# EAGLE board LCmeter0-nokia3310 (EAGLE 7.3.0)
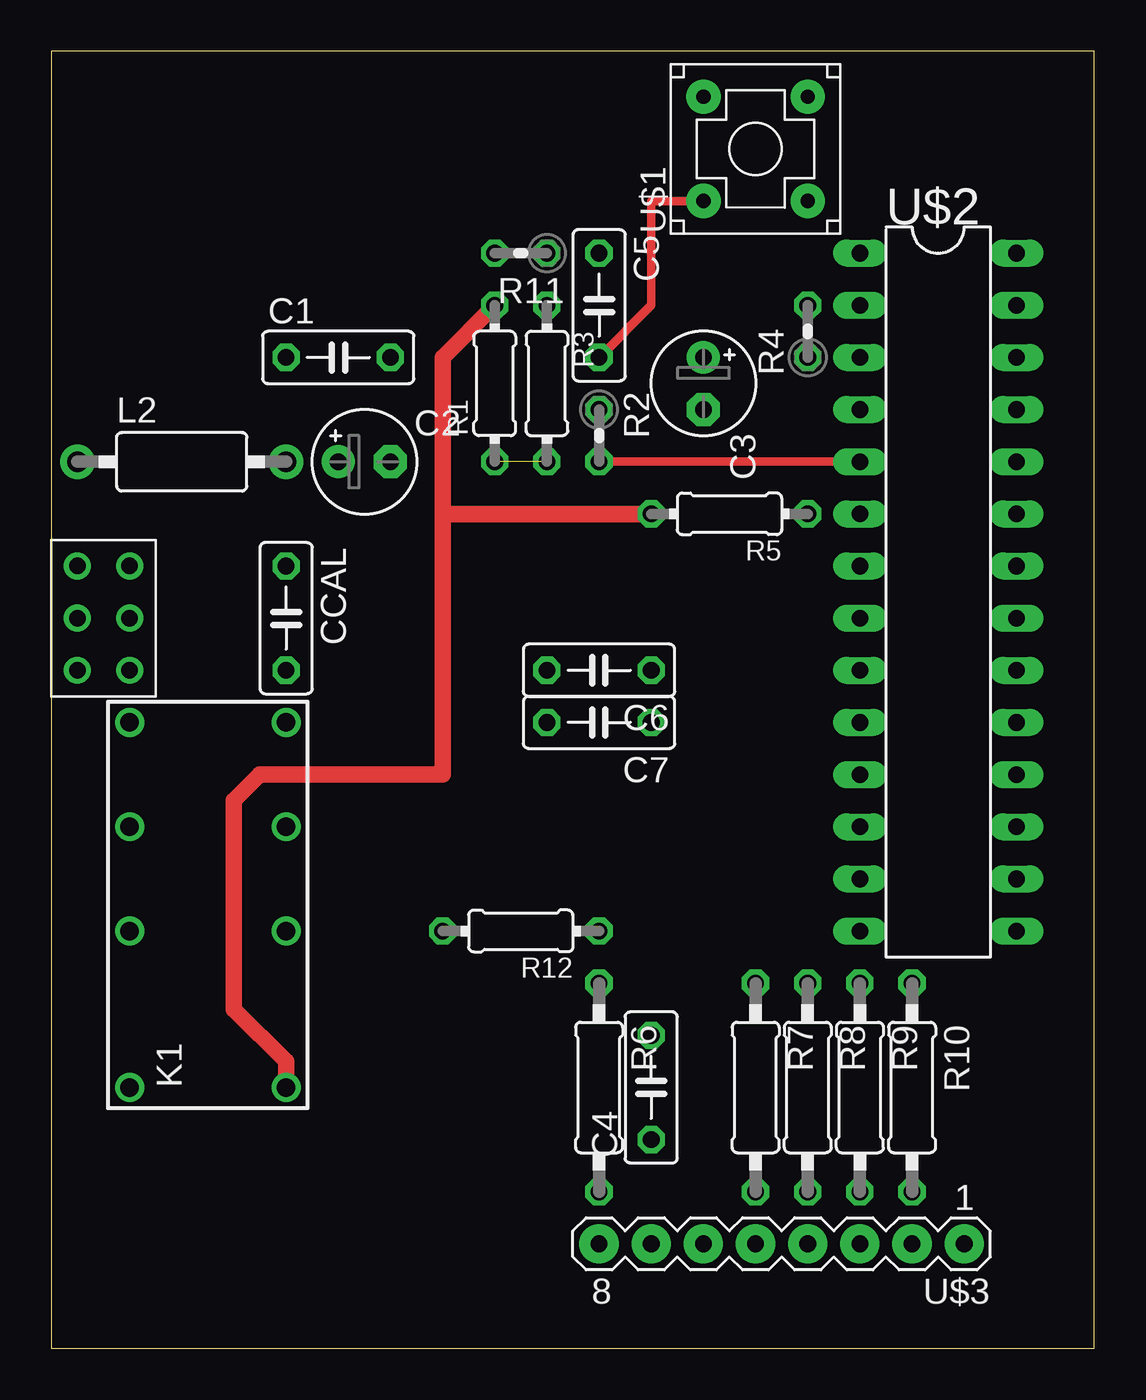
[diagram p0: board, top side]
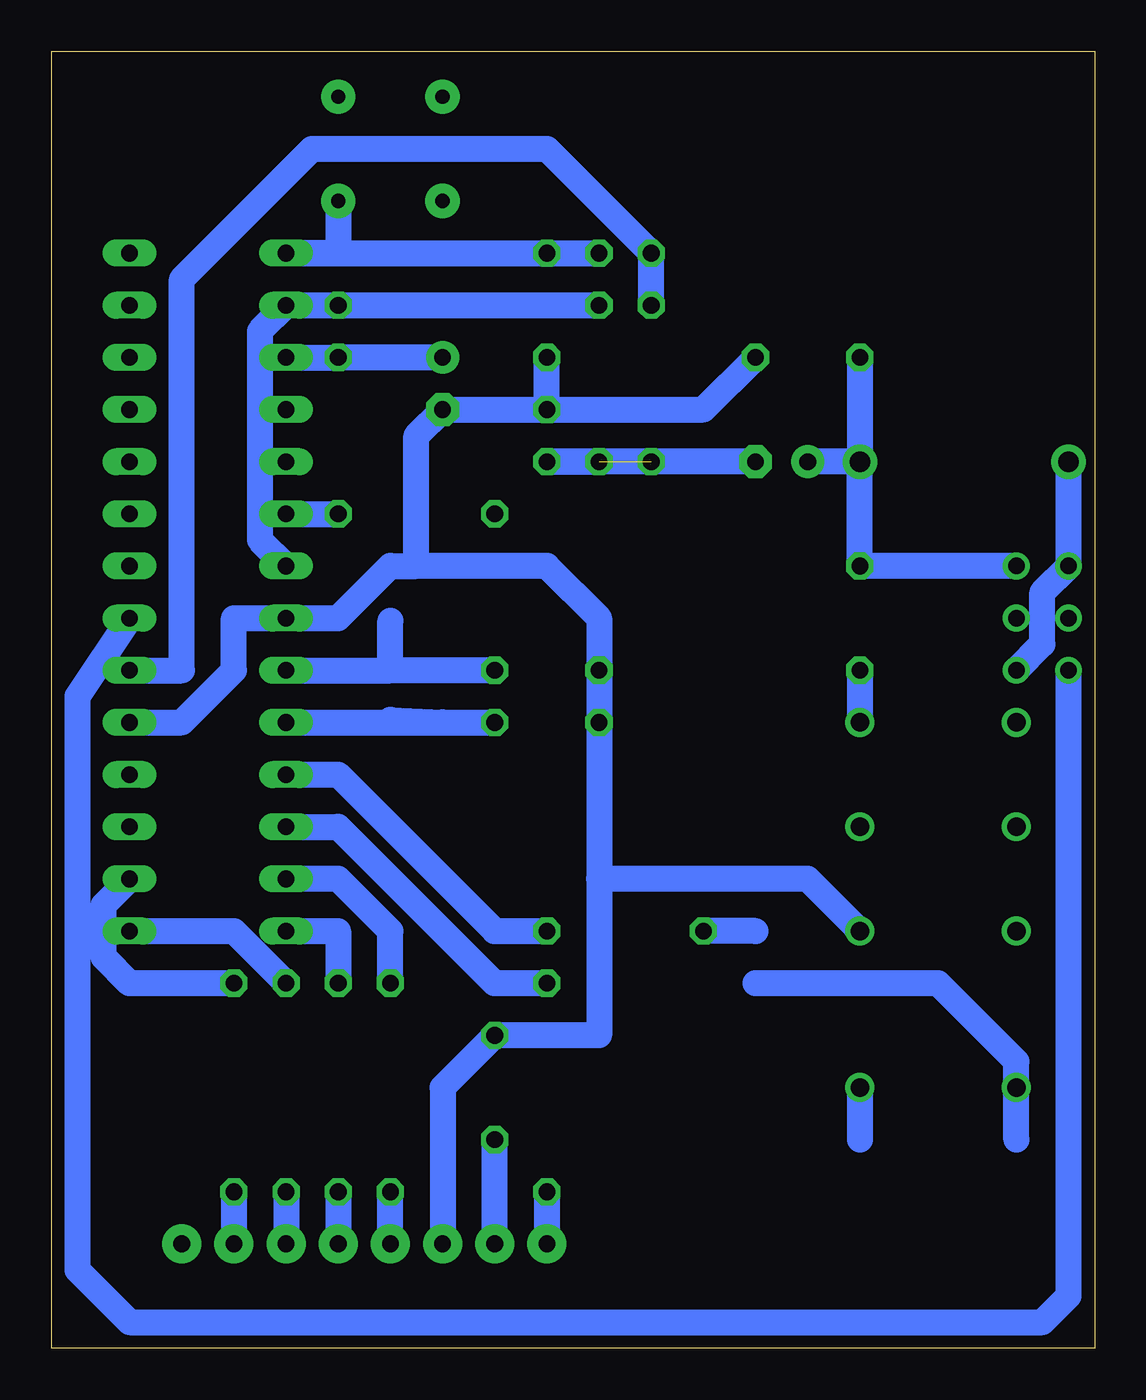
[diagram p1: board, bottom side, seen from below]

Size 50.78 x 63.17 mm. Coordinates in mm from the lower left corner, seen from the top.
Outline: 0,0 50.78,0 50.78,63.17 0,63.17 0,0
Copper layers (1*16): Top 0.035mm / dielectric 1.5mm / Bottom 0.035mm
Design rules "default": minimum track width 10mil, minimum drill 24mil, track to track 8mil, track to pad 8mil, pad to pad 8mil, via to via 8mil, smd to smd 8mil, copper to edge 40mil, drill to drill 8mil, minimum pad ring 10mil, minimum via ring 8mil, stop-mask expansion 4mil, vias tented up to drill 0mil, thermal gap 10mil

## Footprints (pad centres in the part's own frame; a part is rotated, then mirrored left to right if it is on the bottom)
C050-025X075 = drill 0.813 octagon: 1 -2.54,0; 2 2.54,0
E2,5-5 = drill 0.813 pad 1.6: + -1.27,0 | drill 0.813 pad 1.6 octagon: - 1.27,0
DS2Y = drill 0.9: 1 -8.89,-3.81; 4 -1.27,-3.81; 6 3.81,-3.81; 8 8.89,-3.81; 9 8.89,3.81; 11 3.81,3.81; 13 -1.27,3.81; 16 -8.89,3.81
IR-2 = drill 1 pad 1.676: 1 -5.08,0; 2 5.08,0
0204/7 = drill 0.813 octagon: 1 -3.81,0; 2 3.81,0
0204V = drill 0.813 octagon: 1 -1.27,0; 2 1.27,0
0207/10 = drill 0.813 octagon: 1 -5.08,0; 2 5.08,0
PB-5 = drill 0.7 pad 1.676: 1 2.54,-2.54; 2 -2.54,-2.54; 3 2.54,2.54; 4 -2.54,2.54
DIL28-3 = drill 0.813 long: 1 -16.51,-3.81; 2 -13.97,-3.81; 3 -11.43,-3.81; 4 -8.89,-3.81; 5 -6.35,-3.81; 6 -3.81,-3.81; 7 -1.27,-3.81; 8 1.27,-3.81; 9 3.81,-3.81; 10 6.35,-3.81; 11 8.89,-3.81; 12 11.43,-3.81; 13 13.97,-3.81; 14 16.51,-3.81; 15 16.51,3.81; 16 13.97,3.81; 17 11.43,3.81; 18 8.89,3.81; 19 6.35,3.81; 20 3.81,3.81; 21 1.27,3.81; 22 -1.27,3.81; 23 -3.81,3.81; 24 -6.35,3.81; 25 -8.89,3.81; 26 -11.43,3.81; 27 -13.97,3.81; 28 -16.51,3.81
1X8 = drill 0.813 pad 1.905: 1 -8.89,0; 2 -6.35,0; 3 -3.81,0; 4 -1.27,0; 5 1.27,0; 6 3.81,0; 7 6.35,0; 8 8.89,0
DPDT = drill 0.8: 1-1 0,1.27; 1-2 -2.54,1.27; 1-3 2.54,1.27; 2-1 0,-1.27; 2-2 -2.54,-1.27; 2-3 2.54,-1.27

## Placement (x,y rotation side)
C1  1nF  [C050-025X075]  13.97,48.26 0 top
C2  10uF  [E2,5-5]  15.24,43.18 0 top
C3  10uF  [E2,5-5]  31.75,46.99 270 top
C4  220nF  [C050-025X075]  29.21,12.7 90 top
C5  1nF  [C050-025X075]  26.67,50.8 270 top
C6  22pF  [C050-025X075]  26.67,33.02 180 top
C7  22pF  [C050-025X075]  26.67,30.48 180 top
CCAL  1nF  [C050-025X075]  11.43,35.56 270 top
D1  1N4148  [DO35-7]  7.62,10.16 180 top
K1  DS2Y  [DS2Y]  7.62,21.59 90 top
L2  100uH  [IR-2]  6.35,43.18 0 top
Q1  [HC49/S]  34.29,33.02 270 top
R1  100k  [0204/7]  21.59,46.99 90 top
R2  100k  [0204V]  26.67,44.45 270 top
R3  100k  [0204/7]  24.13,46.99 270 top
R4  47k  [0204V]  36.83,49.53 90 top
R5  4.7k  [0204/7]  33.02,40.64 180 top
R6  3.3k  [0207/10]  26.67,12.7 270 top
R7  3.3k  [0207/10]  34.29,12.7 270 top
R8  3.3k  [0207/10]  36.83,12.7 270 top
R9  3.3k  [0207/10]  39.37,12.7 270 top
R10  3.3k  [0207/10]  41.91,12.7 270 top
R11  4.7k  [0204V]  22.86,53.34 180 top
R12  4.7k  [0204/7]  22.86,20.32 180 top
T1  [TO92-CBE]  16.51,20.32 90 top
U$1  PB-SPST  [PB-5]  34.29,58.42 90 top
U$2  PIC16F876A-X/SP-COMP  [DIL28-3]  43.18,36.83 270 top
U$3  NOKIA-3310-64X64  [1X8]  35.56,5.08 180 top
U$4  S-DPDT  [DPDT]  2.54,35.56 270 top

## Library data of the parts
C1-C7 CCAL L2 R1-R12 = rcl
D1 = d
K1 = relay; MPN: DS2Y-S-DC5V; OC_FARNELL: unknown; OC_NEWARK: 13P3268
Q1 = q; OC_FARNELL: 1667008; OC_NEWARK: unknown
T1 = t
U$1-U$4 = mcu

## Nets
+3V3: U$3.1
+5V: D1.C K1.1 R1.2 R5.2 R11.2 U$2.20
GND: C1.2 C3.- C4.2 C5.2 C6.2 C7.2 K1.4 R2.1 T1.E U$1.4 U$2.8 U$2.19 U$3.6
L/C: U$2.21 U$4.2-3
N$1: R6.1 U$2.12
N$2: R7.1 U$2.13
N$3: R8.1 U$2.14
N$4: R9.1 U$2.15
N$5: R10.1 U$2.16
N$6: R5.1 U$2.6
N$8: C5.1 R11.1 U$1.2 U$2.1
N$9: C7.1 Q1.2 U$2.10
N$10: C6.1 Q1.1 U$2.9
N$11: R10.2 U$3.2
N$12: R9.2 U$3.3
N$13: R8.2 U$3.4
N$14: R7.2 U$3.5
N$15: R6.2 U$3.8
N$16: C4.1 U$3.7
N$17: R3.1 R4.2 U$2.2 U$2.7
N$19: R12.2 T1.B
N$20: D1.A K1.16 T1.C
N$21: CCAL.2 K1.8
N$23: C1.1 C2.+ CCAL.1 L2.2 U$4.1-2
N$24: L2.1 U$4.1-3 U$4.2-2
RA1: C3.+ R4.1 U$2.3
RA3: C2.- R1.1 R2.2 R3.2 U$2.5
RELAY: R12.1 U$2.11

## Tracks (layer width: path | path; a pad name or v marks a point on that pad's centre or on a via)
+5V
  Top 0.813: R1.2 19.05,48.26 19.05,40.64 | R5.2 19.05,40.64 | 19.05,40.64 19.05,27.94 10.16,27.94 8.89,26.67 8.89,16.51 11.43,13.97 K1.1
  Bottom 1.27: U$2.20 44.45,33.02 44.45,52.07 38.1,58.42 26.67,58.42 R11.2 R1.2 | K1.1 11.43,10.16
GND
  Top 0.406: U$1.4 29.21,55.88 29.21,50.8 C5.2
  Bottom 1.27: U$2.19 44.45,30.48 41.91,33.02 41.91,35.56 U$2.8 36.83,35.56 34.29,38.1 33.02,38.1 | 33.02,38.1 33.02,44.45 C3.- R2.1 | R2.1 C5.2 | R2.1 19.05,45.72 C1.2 | 24.13,22.86 C7.2 C6.2 24.13,35.56 26.67,38.1 33.02,38.1 | K1.4 13.97,22.86 16.51,22.86 24.13,22.86 | 24.13,22.86 24.13,15.24 C4.2 31.75,12.7 U$3.6
L/C
  Bottom 1.27: U$2.21 49.53,31.75 49.53,3.81 46.99,1.27 2.54,1.27 1.27,2.54 U$4.2-3
N$1
  Bottom 1.27: U$2.12 36.83,25.4 29.21,17.78 R6.1
N$2
  Bottom 1.27: R7.1 34.29,20.32 36.83,22.86 U$2.13
N$3
  Bottom 1.27: U$2.14 36.83,20.32 R8.1
N$4
  Bottom 1.27: U$2.15 41.91,20.32 R9.1
N$5
  Bottom 1.27: R10.1 46.99,17.78 48.26,19.05 48.26,21.59 U$2.16
N$6
  Bottom 1.27: U$2.6 R5.1
N$8
  Bottom 1.27: R11.1 C5.1 U$2.1 36.83,53.34 U$1.2
N$9
  Bottom 1.27: U$2.10 31.75,30.48 | 31.75,30.48 C7.1 | 34.29,30.61 31.75,30.48
N$10
  Bottom 1.27: U$2.9 34.29,33.02 | C6.1 34.29,33.02 | 34.29,33.02 34.29,35.43
N$11
  Bottom 1.27: R10.2 U$3.2
N$12
  Bottom 1.27: R9.2 U$3.3
N$13
  Bottom 1.27: R8.2 U$3.4
N$14
  Bottom 1.27: U$3.5 R7.2
N$15
  Bottom 1.27: R6.2 U$3.8
N$16
  Bottom 1.27: U$3.7 C4.1
N$17
  Bottom 1.27: U$2.7 40.64,39.37 40.64,49.53 U$2.2 R4.2 R3.1
N$19
  Bottom 1.27: 16.51,20.32 R12.2
N$20
  Bottom 1.27: 16.51,17.78 7.62,17.78 3.81,13.97 3.81,10.16 K1.16
N$21
  Bottom 1.27: CCAL.2 K1.8
N$23
  Bottom 1.27: U$4.1-2 CCAL.1 L2.2 | C1.1 L2.2 | L2.2 C2.+
N$24
  Bottom 1.27: U$4.1-3 2.54,34.29 2.54,36.83 U$4.2-2 L2.1
RA1
  Bottom 1.27: C3.+ R4.1 U$2.3
RA3  (1 unrouted)
  Top 0.406: U$2.5 R2.2
  Bottom 1.27: C2.- R2.2 R3.2
RELAY
  Bottom 1.27: U$2.11 36.83,27.94 29.21,20.32 R12.1